# EAGLE board eom_test_pcb_v2 (EAGLE 9.6.2)
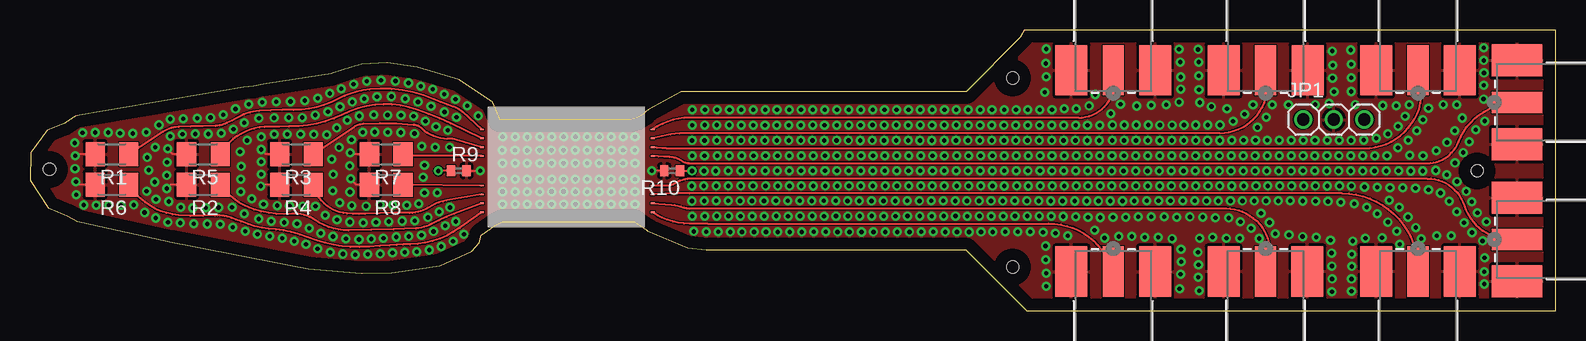
[diagram p0: board, top side]
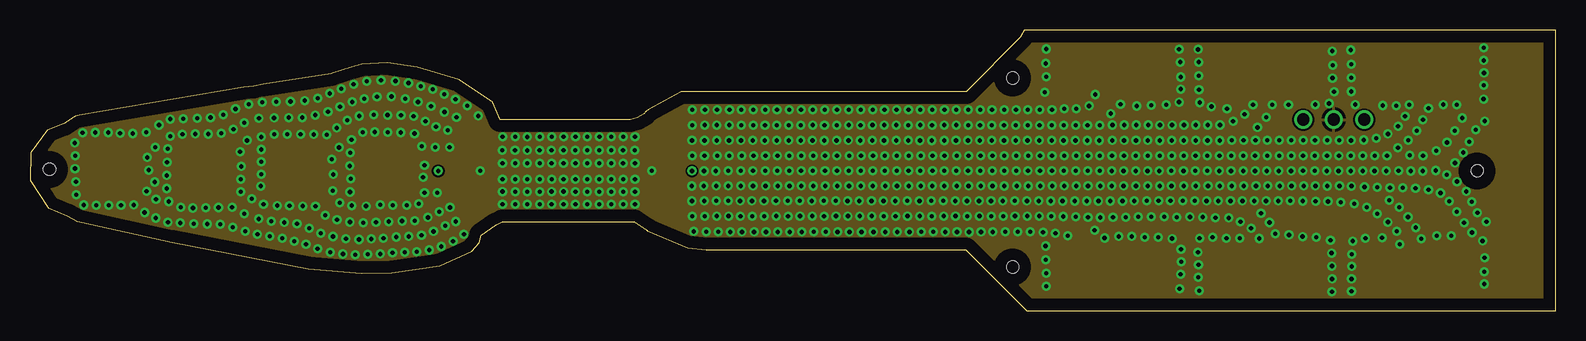
[diagram p1: board, inner layer Route2]
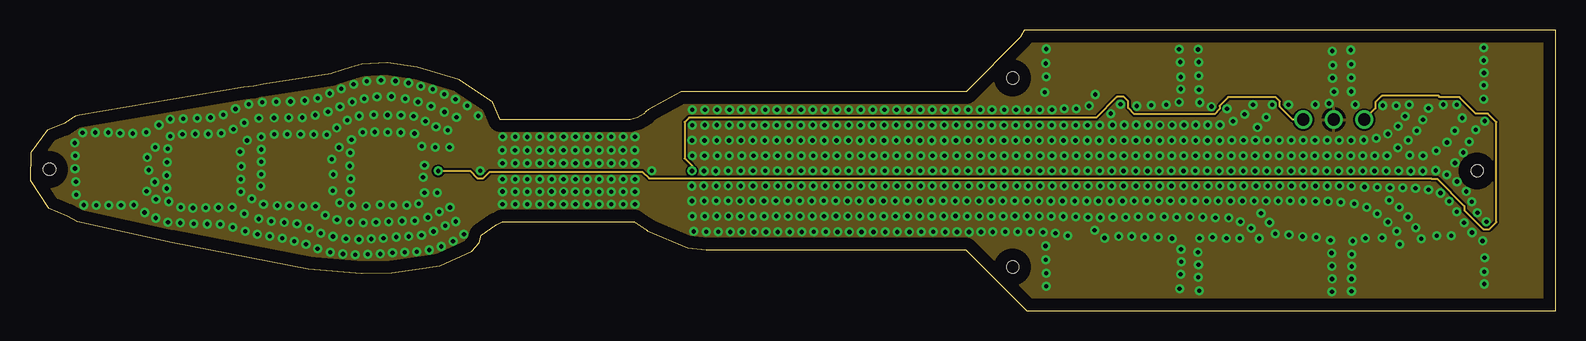
[diagram p2: board, inner layer Route15]
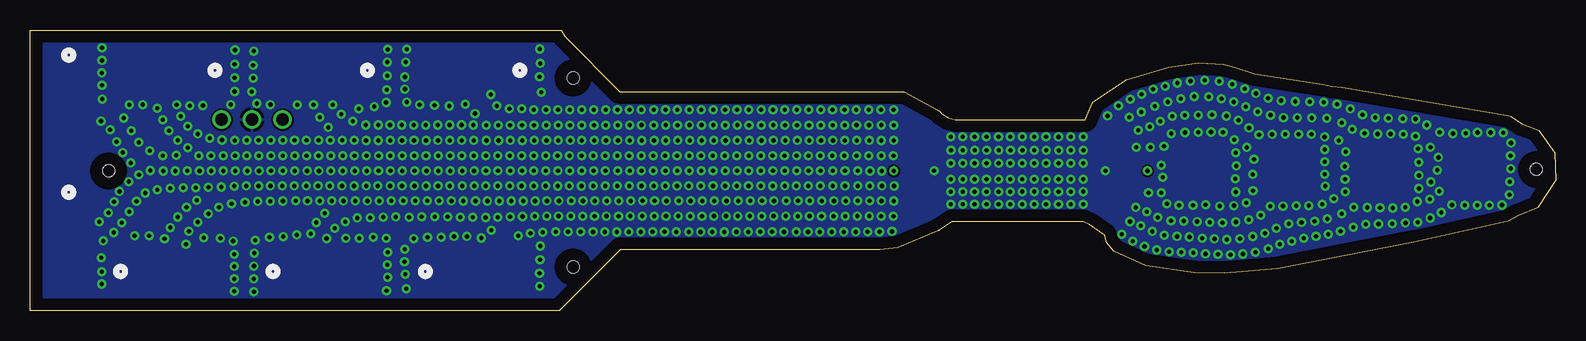
[diagram p3: board, bottom side, seen from below]

Size 127.15 x 23.41 mm. Coordinates in mm from the lower left corner, seen from the top.
Outline: 17.8,18.64 17.8,18.64
Outline: 17.8,18.64 4.09,16.32 3.77,16.23 2.83,15.6 1.42,15.06 0.08,13.17 0,10.89 1.5,8.59 3.11,7.94 3.95,7.49 11.83,5.72 23.18,3.53 27.63,3.15 30.13,3.2 34.16,3.77 36.82,4.97 37.44,5.69 37.61,6.3 38.85,7.19 39.37,7.42 50.35,7.42 51.35,6.76 51.41,6.71 51.42,6.7 51.43,6.7 51.44,6.69 54.82,5.26 56.35,5.1 56.52,5.11 77.97,5.09 83.06,0 86.78,0 87.3,0 127.15,0.01 127.15,23.41 82.86,23.39 82.57,22.89 82.57,22.89 82.55,22.87 78.01,18.27 54.28,18.28 51.54,16.76 51.31,16.6 51.29,16.58 51.18,16.42
Outline: 51.18,16.42 51.18,16.42
Outline: 51.18,16.42 50.62,16.1 50.04,15.94 39.2,15.94 38.57,17.39 35.78,19.28 32.29,20.32 29.76,20.67 27.65,20.54 26.76,20.3 25.2,19.79 25.12,19.77 19.44,18.87 18.66,18.74 17.8,18.64
Copper layers (1*2+15+16): Top 0.035mm / dielectric 4mil / Route2 0.035mm / dielectric 1.2268mm / Route15 0.035mm / dielectric 4mil / Bottom 0.035mm
Design rules "default *": minimum track width 6mil, minimum drill 0.35mm, track to track 4mil, track to pad 6mil, pad to pad 6mil, via to via 6mil, smd to smd 6mil, copper to edge 40mil, drill to drill 6mil, minimum pad ring 10mil, minimum via ring 8mil, stop-mask expansion 4mil, vias tented up to drill 0mil, thermal gap 10mil
Holes 1 mm at 81.89,3.66 81.89,19.41 1.62,11.79 120.6,11.67

## Footprints (pad centres in the part's own frame; a part is rotated, then mirrored left to right if it is on the bottom)
CONN_142-0711-821_CIN = smd 1.778 x 4.191: 1 0,-4.953 | smd 2.667 x 4.191: 2 -3.493,-4.953; 3 3.493,-4.953
1X03 = drill 1.016: 1 -2.54,0; 2 0,0; 3 2.54,0
M1206 = smd 1.6 x 2: 1 -1.4,0; 2 1.4,0
R0402 = smd 0.7 x 0.9: 1 -0.65,0; 2 0.65,0
SIGNAL_BONDING_PAD = smd 0.152 x 0.305: P$1 0,0

## Placement (x,y rotation side)
J1  142-0711-821  [CONN_142-0711-821_CIN]  90.27,25 0 top
J2  142-0711-821  [CONN_142-0711-821_CIN]  115.67,25 0 top
J3  142-0711-821  [CONN_142-0711-821_CIN]  102.97,-1.67 180 top
J4  142-0711-821  [CONN_142-0711-821_CIN]  115.67,-1.67 180 top
J5  142-0711-821  [CONN_142-0711-821_CIN]  128.88,17.38 270 top
J6  142-0711-821  [CONN_142-0711-821_CIN]  128.88,5.95 270 top
J7  142-0711-821  [CONN_142-0711-821_CIN]  90.27,-1.67 180 top
J8  142-0711-821  [CONN_142-0711-821_CIN]  102.97,25 0 top
JP1  [1X03]  108.65,15.95 0 top
R1  [M1206]  6.83,13.07 180 top
R2  [M1206]  14.45,10.53 180 top
R3  [M1206]  22.2,13.06 180 top
R4  [M1206]  22.2,10.52 180 top
R5  [M1206]  14.45,13.07 180 top
R6  [M1206]  6.83,10.53 180 top
R7  [M1206]  29.69,13.07 180 top
R8  [M1206]  29.69,10.53 180 top
R9  [R0402]  35.73,11.68 0 top
R10  [R0402]  53.51,11.68 180 top
U$1  SIGNAL_BONDING_DEVICE  [SIGNAL_BONDING_PAD]  37.67,14.38 90 top
U$2  SIGNAL_BONDING_DEVICE  [SIGNAL_BONDING_PAD]  37.67,8.23 90 top
U$3  SIGNAL_BONDING_DEVICE  [SIGNAL_BONDING_PAD]  37.67,13.65 90 top
U$4  SIGNAL_BONDING_DEVICE  [SIGNAL_BONDING_PAD]  37.67,15.12 90 top
U$5  SIGNAL_BONDING_DEVICE  [SIGNAL_BONDING_PAD]  37.67,9.71 90 top
U$6  SIGNAL_BONDING_DEVICE  [SIGNAL_BONDING_PAD]  37.67,12.91 90 top
U$7  SIGNAL_BONDING_DEVICE  [SIGNAL_BONDING_PAD]  37.67,8.97 90 top
U$8  SIGNAL_BONDING_DEVICE  [SIGNAL_BONDING_PAD]  37.67,10.44 90 top
U$9  SIGNAL_BONDING_DEVICE  [SIGNAL_BONDING_PAD]  51.89,14.38 90 top
U$10  SIGNAL_BONDING_DEVICE  [SIGNAL_BONDING_PAD]  51.89,13.65 90 top
U$11  SIGNAL_BONDING_DEVICE  [SIGNAL_BONDING_PAD]  51.89,10.44 90 top
U$12  SIGNAL_BONDING_DEVICE  [SIGNAL_BONDING_PAD]  51.89,12.91 90 top
U$13  SIGNAL_BONDING_DEVICE  [SIGNAL_BONDING_PAD]  51.89,15.12 90 top
U$14  SIGNAL_BONDING_DEVICE  [SIGNAL_BONDING_PAD]  51.89,8.23 90 top
U$15  SIGNAL_BONDING_DEVICE  [SIGNAL_BONDING_PAD]  51.89,8.97 90 top
U$16  SIGNAL_BONDING_DEVICE  [SIGNAL_BONDING_PAD]  51.89,9.71 90 top

## Library data of the parts
J1-J8 = eom_chip_lib; COPYRIGHT: Copyright (C) 2021 Ultra Librarian. All rights reserved.; MANUFACTURER_PART_NUMBER: 142-0711-821; MFR_NAME: Cinch Connectivity Solutions
JP1 R1-R10 = adafruit
U$1-U$16 = eom_chip_lib

## Nets
GND: J1.2 J1.3 J2.2 J2.3 J3.2 J3.3 J4.2 J4.3 J5.2 J5.3 J6.2 J6.3 J7.2 J7.3 J8.2 J8.3 JP1.2 R1.2 R2.2 R3.2 R4.2 R5.2 R6.2 R7.2 R8.2 R9.2 R10.2
N$1: R7.1 U$6.P$1
N$2: R8.1 U$8.P$1
N$3: R3.1 U$3.P$1
N$4: R4.1 U$5.P$1
N$5: R5.1 U$1.P$1
N$6: R2.1 U$7.P$1
N$7: R1.1 U$4.P$1
N$8: R6.1 U$2.P$1
N$9: J5.1 U$12.P$1
N$10: J6.1 U$11.P$1
N$11: J4.1 U$16.P$1
N$12: J3.1 U$15.P$1
N$13: J7.1 U$14.P$1
N$14: J2.1 U$10.P$1
N$15: J8.1 U$9.P$1
N$16: J1.1 U$13.P$1
TM1: JP1.3 R9.1
TM2: JP1.1 R10.1

## Tracks (layer width: path | path; a pad name or v marks a point on that pad's centre or on a via)
GND  (via drill 0.35, 0.35 pad 0.25)
  Top 0.173: R9.2 v37.52,11.68 v37.53,11.69 | R10.2 52.84,11.69 v51.81,11.69 | R8.2 27.2,10.53 v26.72,11.01 | R7.2 26.78,13.07 v26.68,13.17 | R3.2 19.65,13.07 v19.26,13.45 | R4.2 19.34,10.53 v19.22,10.4 | R5.2 11.91,13.07 v11.48,13.51 | R2.2 11.73,10.53 v11.41,10.2 | R1.2 3.92,13.07 v3.77,12.92 | R6.2 4.06,10.53 v3.83,10.76
  other vias: 37.36,16.25 34.96,13.63 33.78,13.64 32.65,13.72 32.04,14.78 30.9,14.86 29.8,14.89 28.73,14.91 27.73,14.89 26.79,14.26 26.64,12.08 26.67,9.91 26.82,8.78 33.83,15.35 34.81,15.06 32.95,15.8 31.96,16.22 30.92,16.31 29.8,16.32 28.65,16.33 27.45,16.24 26.45,15.88 25.57,15.25 24.74,14.68 25.76,13.62 25.15,12.64 23.65,14.71 22.55,14.73 21.44,14.72 20.36,14.72 19.27,14.5 19.26,12.43 19.26,11.4 36.45,17.1 35.54,16.13 34.54,16.58 33.41,17.06 32.33,17.42 31.27,17.68 30.12,17.87 28.92,17.85 27.87,17.68 26.85,17.41 25.84,17.01 24.84,16.6 23.78,16.32 22.69,16.11 21.55,16.11 20.34,16.08 19.08,16.04 17.85,15.69 16.95,15.14 15.94,14.79 18.09,14.2 17.51,13.25 14.85,14.74 13.77,14.75 12.7,14.72 11.69,14.55 35.46,17.64 34.52,18.04 33.56,18.46 32.56,18.72 31.54,18.99 30.45,19.15 29.25,19.21 28.06,19.14 26.97,18.89 25.93,18.52 24.99,18.12 23.98,17.72 22.9,17.53 21.71,17.45 20.51,17.43 19.35,17.39 18.23,17.21 17.13,16.83 16.11,16.34 15.04,16.11 13.95,16.05 12.76,16.01 11.69,15.98 10.75,15.49 9.69,14.88 10.45,13.63 9.78,12.79 11.42,12.38 11.41,11.29 11.56,9.12 12.55,8.63 13.58,8.57 14.65,8.6 15.71,8.62 16.84,8.63 32.87,12.14 32.76,11.13 33.95,9.84 32.88,9.85 28,8.74 29.18,8.84 30.24,8.79 31.4,8.8 32.41,8.94 35,8.62 34.1,8.26 33.16,7.79 32.06,7.51 31.01,7.49 29.89,7.44 28.83,7.38 27.78,7.36 26.66,7.41 25.58,7.59 25.81,9.01 25.23,10.02 25.27,11.37 24.59,7.97 23.79,8.72 22.74,8.74 21.63,8.76 20.6,8.78 19.46,8.88 17.59,12.04 35.48,7.45 34.6,7.09 33.62,6.62 32.63,6.31 31.57,6.21 30.53,6.16 29.45,6.05 28.45,6 27.42,5.95 26.33,6.02 25.25,6.2 24.24,6.47 23.28,6.88 22.25,7.26 21.19,7.37 20.1,7.48 19.05,7.66 17.85,8.1 18.49,9.36 17.55,9.93 17.57,10.97 17.94,6.64 18.95,6.38 19.99,6.21 21.01,6.05 22.01,5.81 23,5.54 23.96,5.18 25.03,4.9 26.08,4.74 27.11,4.67 28.15,4.71 29.19,4.75 30.21,4.84 31.22,4.88 32.23,4.92 33.26,5.08 34.27,5.37 35.26,5.8 36.16,6.38 16.89,6.96 15.84,7.23 14.78,7.24 13.64,7.26 12.53,7.33 11.49,7.4 10.48,7.74 9.55,8.2 8.66,8.83 9.71,9.97 9.89,11.73 10.41,10.74 10.5,9.3 7.58,8.81 6.55,8.81 5.53,8.81 4.48,8.82 3.86,9.69 3.75,11.86 3.73,14 4.38,14.86 5.44,14.87 6.53,14.87 7.5,14.82 8.57,14.78 56.17,11.66 57.15,11.66 58.18,11.68 59.23,11.68 60.24,11.67 61.28,11.67 62.27,11.68 63.26,11.68 64.26,11.67 65.24,11.67 66.25,11.67 67.24,11.67 68.23,11.67 69.22,11.67 56.16,10.41 55.15,10.41 81.27,6.59 93.06,9.17 94.05,9.17 95.04,9.17 88.17,10.41 89.18,10.42 90.13,10.41 91.13,10.42 92.16,10.41 93.15,10.41 94.15,10.41 95.12,10.41 88.16,11.67 89.15,11.67 90.14,11.67 91.13,11.66 92.14,11.66 93.13,11.67 94.12,11.67 95.11,11.67 96.13,11.66 97.11,11.67 98.11,11.67 99.1,11.67 100.09,11.66 101.09,11.66 102.09,11.67 103.07,11.67 104.06,11.67 96.15,10.42 97.14,10.42 96.06,9.17 97.05,9.17 98.05,9.17 99.03,9.16 100.04,9.16 101.03,9.17 102.02,9.17 103.01,9.17 91.04,9.16 92.03,9.16 83.08,9.16 84.07,9.16 85.06,9.16 86.05,9.16 87.06,9.16 88.05,9.16 89.03,9.16 90.02,9.16 83.11,7.9 84.1,7.9 85.09,7.89 74.15,7.9 75.14,7.9 76.13,7.9 77.12,7.9 78.11,7.9 79.12,7.9 80.11,7.9 81.1,7.9 82.08,7.9 65.19,7.9 66.17,7.9 67.17,7.9 68.16,7.9 69.15,7.9 70.16,7.9 71.15,7.9 72.13,7.9 73.13,7.9 55.16,9.16 56.2,9.17 57.19,9.17 58.18,9.17 59.17,9.17 60.16,9.16 61.17,9.16 62.16,9.17 63.15,9.17 64.14,9.17 65.16,9.16 66.14,9.17 67.14,9.17 68.13,9.17 69.11,9.16 70.12,9.16 71.12,9.17 72.1,9.17 73.09,9.17 74.12,9.16 75.11,9.17 76.1,9.17 77.09,9.17 78.08,9.16 79.09,9.16 80.08,9.17 81.07,9.17 82.05,9.17 79.22,10.41 80.21,10.42 81.2,10.41 82.22,10.41 83.18,10.41 84.19,10.42 85.18,10.41 86.19,10.41 87.18,10.42 70.24,10.41 71.26,10.42 72.25,10.41 73.23,10.42 74.22,10.41 75.18,10.42 76.19,10.42 77.22,10.41 78.22,10.41 57.18,10.41 58.18,10.41 59.23,10.42 60.25,10.41 61.3,10.41 62.31,10.41 63.29,10.41 64.27,10.41 65.26,10.41 66.26,10.41 67.28,10.41 68.25,10.42 69.23,10.41 70.24,11.67 71.23,11.68 72.22,11.68 73.21,11.67 74.2,11.67 75.21,11.67 76.2,11.67 77.18,11.67 78.17,11.67 79.2,11.67 80.19,11.68 81.18,11.68 82.18,11.67 83.16,11.67 84.17,11.67 85.16,11.67 86.15,11.67 87.14,11.67 98.17,10.42 99.14,10.41 100.15,10.41 101.16,10.42 102.17,10.41 103.15,10.41 104.14,10.41 105.13,10.41 106.14,10.42 107.12,10.41 108.1,10.41 109.12,10.41 110.12,10.4 105.09,11.66 106.08,11.67 107.07,11.67 108.06,11.67 109.05,11.66 110.06,11.66 111.05,11.67 112.04,11.67 113.02,11.67 73.29,6.58 74.28,6.58 75.27,6.59 76.26,6.58 77.25,6.58 78.26,6.58 79.25,6.58 80.23,6.58 64.32,6.58 65.31,6.58 66.31,6.59 67.3,6.58 68.28,6.58 69.29,6.58 70.29,6.58 71.27,6.58 72.26,6.58 82.31,6.6 83.35,6.6 84.42,6.55 85.45,6.47 86.47,6.26 89.55,6.07 88.72,6.72 86.11,7.87 87.14,7.84 88.17,7.81 89.19,7.78 90.25,7.81 91.31,7.8 92.35,7.84 93.43,7.84 94.52,7.85 95.56,7.81 96.66,7.83 97.73,7.82 98.79,7.77 99.89,7.75 100.87,7.43 101.75,6.89 102.44,6.03 102.59,8.13 103.29,7.37 103.76,6.43 106.07,9.16 107.13,9.14 108.16,9.12 109.24,9.06 110.36,8.92 111.41,8.63 112.28,8.1 113.16,7.4 113.91,6.63 114.15,5.55 115.94,6.02 115.47,6.94 114.83,7.83 111.21,10.32 112.28,10.29 113.33,10.26 114.39,10.27 115.46,10.23 116.54,10.09 117.54,9.82 118.28,9.13 118.89,8.26 119.51,7.35 120.17,6.53 121.05,5.83 114.11,8.63 113.26,9.23 121.37,7.43 120.62,8.19 114.05,11.68 115.06,11.66 116.06,11.66 117.14,11.7 118.07,11.34 118.92,10.78 119.7,9.95 120.15,9.1 55.2,12.93 56.21,12.93 57.26,12.93 58.27,12.92 59.31,12.92 60.3,12.93 61.29,12.93 62.28,12.93 63.27,12.92 64.28,12.92 65.27,12.93 66.26,12.93 67.25,12.93 86.19,12.92 87.18,12.92 88.17,12.92 89.16,12.92 90.17,12.92 91.16,12.92 92.14,12.92 93.13,12.92 94.15,12.92 95.14,12.92 96.14,12.92 97.13,12.92 98.1,12.92 99.12,12.92 100.12,12.92 101.1,12.92 102.09,12.92 68.26,12.92 69.25,12.93 70.25,12.93 71.24,12.92 72.22,12.92 73.23,12.92 74.23,12.92 75.21,12.93 76.2,12.93 77.23,12.92 78.22,12.93 79.21,12.93 80.2,12.92 81.19,12.92 82.2,12.92 83.19,12.92 84.17,12.93 85.16,12.93 103.11,12.92 104.1,12.92 105.1,12.92 106.09,12.92 107.07,12.92 108.08,12.92 109.08,12.92 110.06,12.92 111.05,12.92 112.07,12.93 113.08,12.92 86.18,16.84 87.2,16.84 88.26,17.08 90.07,16.44 90.88,17.22 88.76,18.03 84.68,21.83 84.64,20.62 84.69,19.51 84.55,18.22 92.22,17.07 93.44,17.14 94.69,17.19 95.76,17.4 95.91,18.48 95.91,19.49 95.84,20.73 95.76,21.8 97.34,21.79 97.39,20.73 97.39,19.6 97.42,18.42 97.48,17.36 98.45,17.03 101.92,17.18 101.21,16.4 100.26,15.79 99.75,16.83 102.29,15.29 103.02,16.14 103.53,17.18 104.87,17.17 107.11,17.2 108.26,17.29 108.67,18.26 108.54,19.41 108.56,20.47 108.51,21.65 110.07,21.74 110.1,20.55 110.1,19.42 110.1,18.28 110.43,17.2 112.74,17.11 113.85,17.09 114.94,17.18 114,15.39 113.16,14.75 112.18,14.38 111.15,14.24 114.59,16.22 114,13.6 114.85,14.22 115.57,15.01 116.08,15.94 116.54,16.88 117.76,17.19 118.89,17.17 121.13,17.66 121.15,18.81 121.16,19.83 121.15,20.87 121.15,21.93 119.35,16.07 118.72,15.01 118.08,14.04 117.18,13.34 116.09,12.93 114.97,12.98 118.75,12.33 119.43,13.19 119.94,14.09 120.48,15.09 121.23,15.82 84.63,5.41 84.65,4.26 84.69,3.15 84.68,2.07 90.74,6.2 91.82,6.2 92.9,6.13 94.03,6.13 95.17,6.03 95.91,5.14 95.95,4.1 95.88,3.05 95.8,1.86 97.44,1.69 97.35,2.79 97.38,3.84 97.33,4.88 97.47,6.06 98.55,6.14 99.7,6.06 100.82,6.06 104.92,6.33 106.05,6.19 107.2,6.15 108.37,5.88 108.46,4.82 108.49,3.74 108.51,2.66 108.49,1.61 110.12,1.64 110.12,2.66 110.14,3.7 110.14,4.72 110.23,5.82 111.28,6.06 112.67,6.1 121.21,4.43 121.18,3.26 121.18,2.24 117.23,6.25 118.44,6.25 55.18,15.48 56.22,15.48 57.24,15.48 58.28,15.48 59.27,15.48 60.26,15.48 61.25,15.48 62.24,15.48 63.24,15.48 64.24,15.48 65.22,15.48 66.21,15.48 85.15,15.48 86.15,15.47 87.14,15.48 88.12,15.48 89.13,15.48 67.23,15.48 68.22,15.48 69.21,15.48 70.2,15.48 71.19,15.48 72.2,15.48 73.19,15.48 74.18,15.48 75.17,15.48 76.2,15.48 77.18,15.48 78.18,15.48 79.17,15.48 80.15,15.48 81.16,15.48 82.16,15.48 83.14,15.48 84.13,15.48 55.19,16.77 56.24,16.77 57.25,16.76 58.29,16.76 59.28,16.77 60.27,16.77 61.27,16.77 62.25,16.76 63.26,16.76 64.25,16.77 65.24,16.77 66.23,16.77 85.17,16.76 67.25,16.76 68.23,16.77 69.23,16.77 70.22,16.76 71.21,16.76 72.22,16.76 73.21,16.77 74.19,16.77 75.18,16.77 76.21,16.76 77.2,16.77 78.19,16.77 79.18,16.76 80.17,16.76 81.18,16.76 82.17,16.77 83.16,16.77 84.15,16.77 90.2,15.49 91.19,15.49 92.19,15.49 93.18,15.49 94.16,15.49 95.17,15.49 96.17,15.49 97.15,15.49 98.14,15.49 99.17,15.49 108.1,14.21 109.1,14.21 110.09,14.21 90.18,14.2 91.17,14.2 92.17,14.21 93.16,14.21 94.14,14.2 95.15,14.2 96.15,14.21 97.14,14.2 98.13,14.2 99.15,14.2 100.14,14.22 101.13,14.22 102.12,14.21 103.11,14.21 104.12,14.21 105.11,14.21 106.09,14.21 107.08,14.21 55.17,14.21 56.21,14.2 57.22,14.21 58.26,14.21 59.25,14.2 60.24,14.21 61.23,14.21 62.22,14.2 63.23,14.21 64.22,14.21 65.2,14.21 66.19,14.2 85.13,14.21 86.13,14.2 87.12,14.21 88.11,14.2 89.11,14.2 67.21,14.2 68.2,14.2 69.19,14.2 70.18,14.2 71.17,14.2 72.18,14.21 73.18,14.2 74.16,14.2 75.15,14.2 76.18,14.2 77.17,14.21 78.16,14.21 79.15,14.21 80.14,14.21 81.17,14.2 82.14,14.21 83.12,14.21 84.11,14.21 55.2,7.9 56.23,7.9 57.22,7.9 58.21,7.9 59.2,7.9 60.19,7.9 61.2,7.9 62.19,7.9 63.17,7.9 64.16,7.9 55.32,6.62 56.36,6.59 57.35,6.59 58.34,6.58 59.33,6.58 60.34,6.58 61.33,6.58 62.32,6.58 63.31,6.58 39.38,14.51 40.43,14.51 41.45,14.5 42.48,14.5 43.47,14.51 44.47,14.51 45.46,14.5 46.44,14.5 47.45,14.5 48.45,14.5 49.43,14.51 50.42,14.51 39.36,13.39 40.42,13.38 41.43,13.38 42.47,13.38 43.45,13.38 44.45,13.38 45.44,13.38 46.43,13.38 47.44,13.38 48.43,13.38 49.41,13.38 50.4,13.38 39.37,12.31 40.43,12.3 41.44,12.3 42.48,12.3 43.47,12.3 44.46,12.31 45.45,12.3 46.44,12.3 47.45,12.3 48.44,12.3 49.42,12.3 50.41,12.3 39.37,10.97 40.43,10.97 41.44,10.98 42.48,10.98 43.47,10.97 44.46,10.98 45.45,10.97 46.44,10.97 47.44,10.97 48.44,10.97 49.43,10.97 50.42,10.97 39.38,9.94 40.43,9.94 41.44,9.93 42.48,9.94 43.47,9.94 44.46,9.94 45.45,9.94 46.44,9.94 47.45,9.94 48.44,9.94 49.43,9.94 50.41,9.94 39.38,8.9 40.43,8.9 41.44,8.89 42.48,8.89 43.47,8.9 44.46,8.9 45.45,8.9 46.44,8.89 47.45,8.89 48.44,8.9 49.43,8.9 50.41,8.9 104.03,9.16 105.01,9.17
  pour Top (isolate 0.102): 41.76,20.94 -3.96,20.94 -3.96,0.62 41.76,0.62
  pour Top (isolate 0.102): 41.76,20.94 41.76,0.62 82.4,0.62 82.4,20.94
  pour Top (isolate 0.102): 82.4,0.62 82.4,-4.46 128.12,-4.46 128.12,26.02 82.4,26.02
  pour Route2 (isolate 0.152): 128.12,26.02 -3.96,26.02 -3.96,-4.46 128.12,-4.46
  pour Route15 (isolate 0.152): 128.12,26.02 -3.96,26.02 -3.96,-4.46 128.12,-4.46
  pour Bottom (isolate 0.152): 128.12,26.02 -3.96,26.02 -3.96,-4.46 128.12,-4.46
N$1
  Top 0.173: U$6.P$1 31.09,12.91 R7.1
N$2
  Top 0.173: U$8.P$1 R8.1
N$3
  Top 0.173: U$3.P$1 35.5,14.28 arc19 34.78,14.36 arc-42 32.64,15.22 arc38 31.94,15.53 arc8 27.79,15.6 arc31 27.02,15.35 R3.1
N$4
  Top 0.173: U$5.P$1 34.73,9.2 arc23 33.17,8.61 arc-33 31.64,8.17 arc4 27.9,8.1 arc-8 26.43,8.12 arc-71 R4.1
N$5
  Top 0.173: U$1.P$1 35.06,15.62 arc6 32.26,16.77 arc46 26.01,16.36 arc-24 22.4,15.4 arc-4 19.94,15.36 arc60 R5.1
N$6
  Top 0.173: U$7.P$1 35.31,8.08 arc7 33.47,7.25 arc-25 32.15,6.89 arc-3 26.54,6.72 arc-35 23.75,7.58 arc40 21.81,8.1 arc-23 18.65,8.47 arc-36 R2.1
N$7
  Top 0.173: U$4.P$1 36.05,16.58 arc23 35.28,17.03 arc-5 33.67,17.65 arc29 28.3,18.47 arc22 25.71,17.68 arc-28 21.96,16.75 arc3 19.09,16.67 arc24 17.58,16.26 arc-1 16.41,15.66 arc-26 15.44,15.43 arc2 12.36,15.34 arc31 11.07,14.92 arc-1 R1.1
N$8
  Top 0.173: U$2.P$1 35.82,6.92 arc-34 31.66,5.55 arc4 29.97,5.47 arc-3 27.45,5.34 arc-21 23.87,5.9 arc3 21.74,6.58 arc13 20.51,6.79 arc-20 17.59,7.46 arc8 16.4,7.87 arc19 15.43,7.96 arc-9 12.38,7.98 arc-53 R6.1
N$9
  Top 0.173: U$12.P$1 arc0 53.31,12.84 arc-31 54.32,12.49 arc35 54.93,12.3 116.43,12.3 arc68 119.03,14.07 arc-69 J5.1
N$10
  Top 0.173: J6.1 arc-78 119.53,8.79 arc72 116.43,11.03 55.22,11.03 arc31 53.76,10.63 arc-37 52.87,10.44 U$11.P$1 arc12 U$11.P$1
N$11
  Top 0.173: J4.1 arc91 109.32,9.79 54.96,9.79 arc3 U$16.P$1
N$12
  Top 0.173: U$15.P$1 53.46,8.84 arc-15 54.49,8.62 arc24 55.09,8.54 99.67,8.54 arc-116 J3.1
N$13
  Top 0.173: J7.1 arc73 84.87,7.28 56.48,7.28 54.94,7.28 arc-35 U$14.P$1
N$14
  Top 0.173: U$10.P$1 arc10 53.04,13.55 111.19,13.55 arc111 J2.1
N$15
  Top 0.173: J8.1 arc-108 99.14,14.82 54.9,14.82 arc17 U$9.P$1
N$16
  Top 0.173: J1.1 arc-108 87.38,16.1 54.96,16.1 arc35 U$13.P$1
TM1  (via drill 0.35 pad 0.25)
  Top 0.173: R9.1 v34.03,11.67
  Route15 0.173: v34.03,11.67 36.67,11.67 37.28,11.06 37.78,11.06 38.31,11.59 51.03,11.59 51.58,11.04 116.76,11.04 116.81,10.99 117.28,10.99 119.54,8.74 119.54,8.38 121.11,6.81 121.62,6.81 122.2,7.39 122.2,15.73 121.5,16.44 120.49,16.44 119.11,17.82 117.48,17.82 117.39,17.92 112.66,17.92 112.12,17.38 112.12,16.88 JP1.3
TM2  (via drill 0.35 pad 0.25)
  Top 0.173: R10.1 v55.16,11.68 v55.17,11.66
  Route15 0.173: JP1.1 105.22,15.95 104.15,17.02 104.15,17.46 103.79,17.81 99.85,17.81 99.13,17.09 99.13,16.83 98.71,16.41 92.01,16.41 91.5,16.91 91.5,17.49 91.15,17.84 90.58,17.84 88.84,16.1 83.88,16.1 | 83.88,16.1 | v55.17,11.66 55.17,12.08 54.55,12.7 54.55,15.73 54.92,16.1 78.43,16.1 83.88,16.1